# Altium PCB Water Intrusion.PcbDoc
Units mil, origin at the board's own origin, x right, y up, seen from the top; angles counter-clockwise.
Board outline 1000 x 1000 mil, 2 copper layers (Top Layer, Bottom Layer); 11 components, 6 nets, 35 pads, 13 vias.
Unrouted connection lines stored in the file: 1.
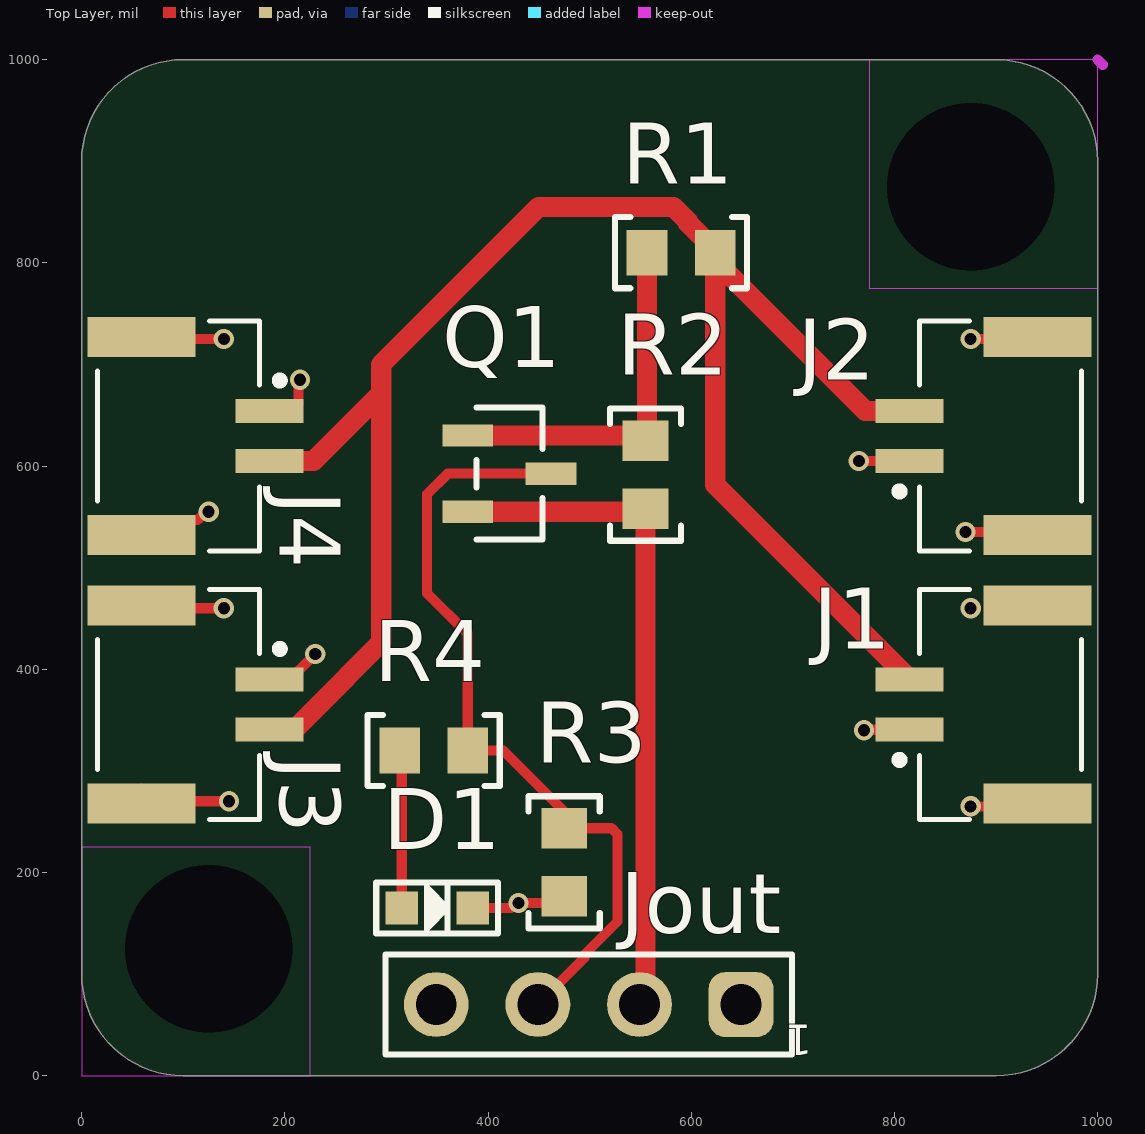
[diagram p0: Top Layer view]
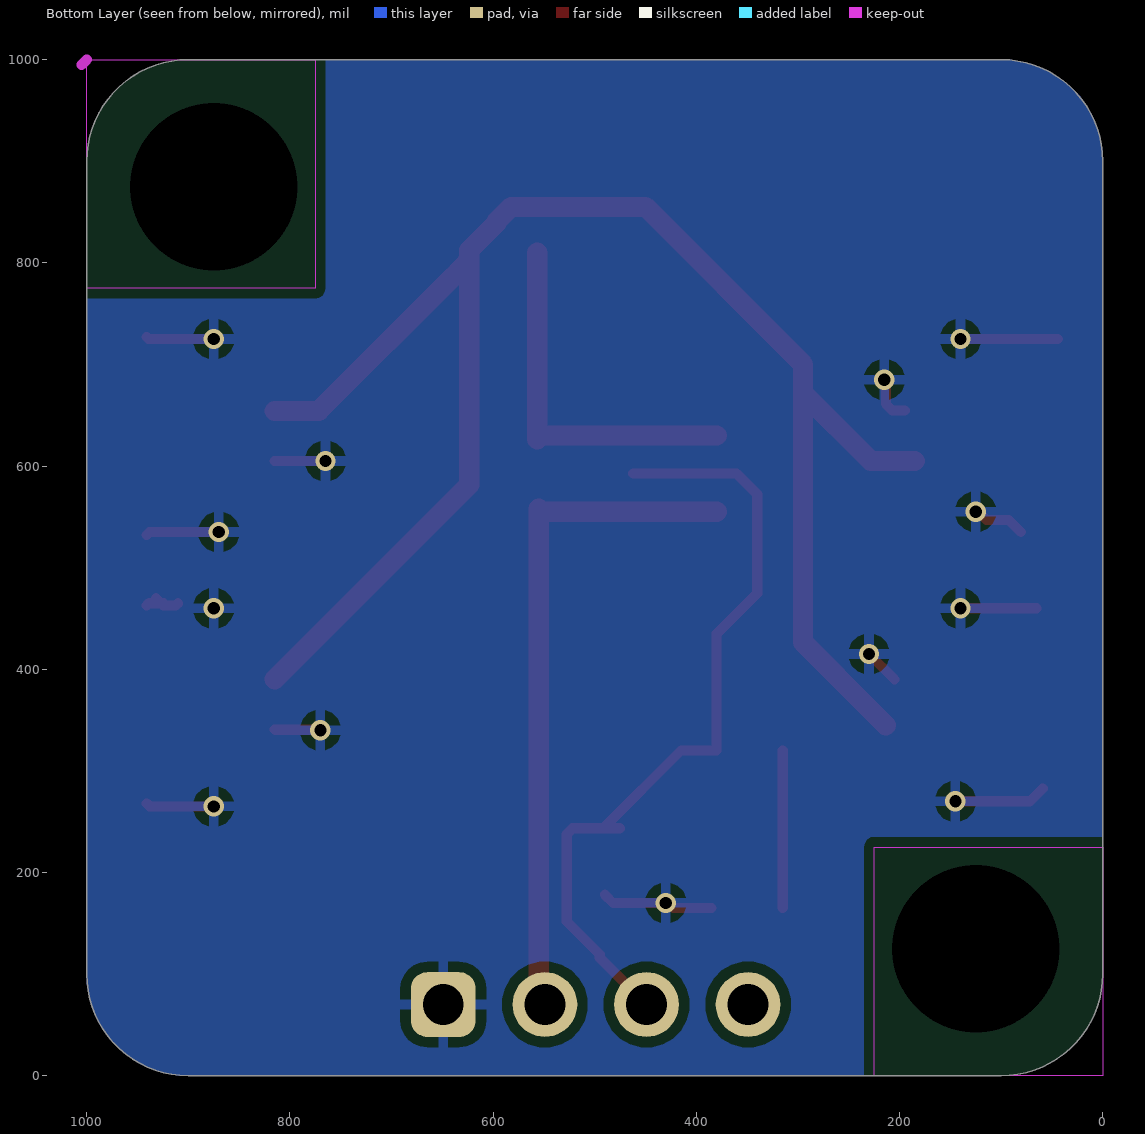
[diagram p1: Bottom Layer view, seen from below]
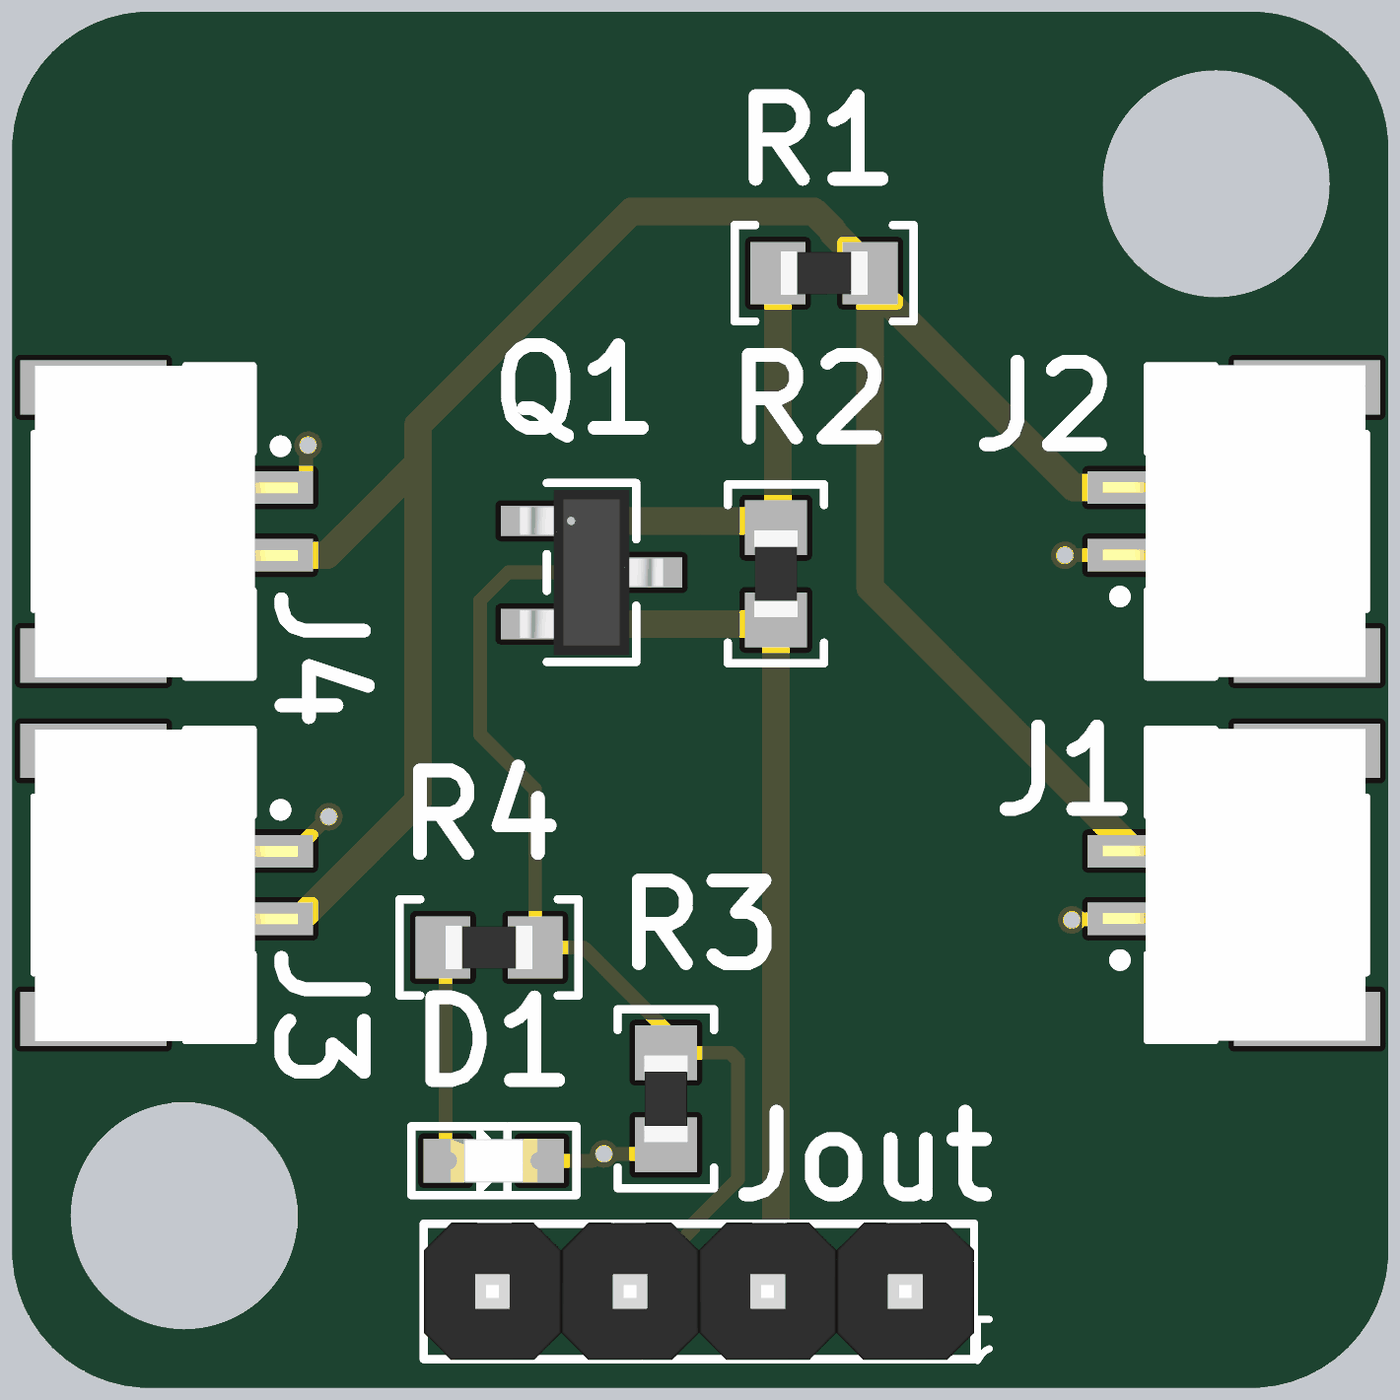
[diagram p2: 3D render of the assembled board from above, using the file's embedded part models]

## Layer stack, top to bottom
Top Solder: solder mask 0.4, Solder Resist, Dk 3.5
Top Layer: signal copper 1.4
Dielectric 1: dielectric 12.6, FR-4, Dk 4.8
Bottom Layer: signal copper 1.4
Bottom Solder: solder mask 0.4, Solder Resist, Dk 3.5

## Board outline
100,0 cw(c100,100) 0,100 0,900 cw(c100,900) 100,1000 900,1000 cw(c900,900) 1000,900 1000,100 cw(c900,100) 900,0

## Design rules (kind name [scope] priority, off if disabled: settings)
Clearance [All] p1: gap=10 ignorepadtopadclearanceinfootprint=FALSE except(0: Arc-Hole Track-Hole SMDPad-Hole THPad-Hole Via-Hole Fill-Hole Poly-Hole Region-Hole Text-Hole)
PolygonConnect [All] p1: connectstyle=Relief reliefconductorwidth=10 reliefentries=4 polygonreliefangle="90 Angle" airgapwidth=10
RoomDefinition "Water Intrustion" [InComponentClass('Water Intrustion')] p1: confinementstyle=ConfineIn formatcopy=TRUE lockcomponents=FALSE outline 1180,60 1510,60 1510,530 1180,530
RoutingVias [All] p1: holewidth=28 width=50 viastyle="Through Hole" minholewidth=28 minwidth=50 maxholewidth=28 maxwidth=50
SolderMaskExpansion [All] p1: expansion=4 istentingtop=FALSE
Width [All] p1: maxlimit=10 minlimit=10 preferedwidth=10
30 further rules are at their usual default settings.

## Components (designator, comment, footprint, x,y, rotation, side; value= is the part's Value field where it differs from the comment)
D1 "IN-S63AT5G" LED_0603 350,165 r0 top
J1 "JST GH VERT" CONN_JST_SM02B-GHS-TB(LF)(SN) 815,340.79 r90 top
J2 "JST GH VERT" CONN_JST_SM02B-GHS-TB(LF)(SN) 815,605 r90 top
J3 "JST GH VERT" CONN_JST_SM02B-GHS-TB(LF)(SN) 185,390 r270 top
J4 "JST GH VERT" CONN_JST_SM02B-GHS-TB(LF)(SN) 185,654.21 r270 top
Jout "HEADER VERT 2.54MM" HEADER_4PIN_2.54MM 649.05,70 r180 top
Q1 "PNP 60V 600mA SOT23" SOT-23-3 421,592.5 r270 top
R1 "1k Ohm 5% 1/8W" RESISTOR_0603 590,810 r0 top
R2 "27k Ohm 5% 1/8W" RESISTOR_0603 555,591.5 r90 top
R3 "1k Ohm 5% 1/8W" RESISTOR_0603 475,210 r270 top
R4 "RES SMD 240 OHM 5% 1/10W 0603" RESISTOR_0603 346.5,320 r180 top

## Footprints (in the part's own frame and the unit in brackets; to place one, negate y for a bottom-side part, rotate by r counter-clockwise, add the part's x,y. Pads: shape width x height; smd on the part's side, far side on the other; paste and mask are expansions set on the pad)
CONN_JST_SM02B-GHS-TB(LF)(SN) [mm] "JST GH Pitch 2 Pos R/A"
  rect 0.6x1.7 smd: 1(0,0) 2(1.25,0)
  rect 1x2.7 smd: S1(-1.85,-3.2) S2(3.1,-3.2)
  silkscreen extent -2.25,-4.3 3.5,0.35, body extent -2.25,-4.28 3.5,0.58, height 4.26
HEADER_4PIN_2.54MM [mm]
  rrect50% 1.62x1.62 hole 1.02: 1(0,0)
  round 1.62 hole 1.02: 2(2.54,0) 3(5.08,0) 4(7.62,0)
  silkscreen extent -1.27,-1.25 8.89,1.25, body extent -1.27,-1.27 8.89,1.27, height 10.48
LED_0603 [mil] "LED 0603"
  rect 32x32 smd: 1(-35,0) 2(35,0)
  silkscreen extent -60,-25 60,25, body extent -31,-16 32,16, height 28
RESISTOR_0603 [mil] "Resistor 0603"
  rect 40x45 smd: 1(-33.5,0) 2(33.5,0)
  silkscreen extent -65,-35 65,35, body extent -31,-16 32,16, height 16
SOT-23-3 [mil]
  rect 22x50 smd paste+0 mask+4: 1(-37.5,-41) 2(37.5,-41) 3(0,41)
  silkscreen extent -65,-33 65,33, body extent -60,-52 60,52, height 44

## Part data
D1: library part LED_Green_0603_3V, "LED Green Vf= 3V If = 0.005A / IN-S63AT5G", Color=Green, Forward Current=5mA, Forward Voltage=3V, Package=0603, Supplier Part Number 1=1830-1062-1-ND, ComponentLink1Description=Datasheet, ComponentLink1URL=https://www.we-online.de/katalog/datasheet/150060GS75000.pdf, Made By="Robert Pafford", Supplier 1=Digi-Key
J1 J2 J3 J4: library part CONN_JST_GH_2POS_VERT, "JST GH Pitch 2 Pos Vertical", Color=Natural, Current Per Pin=1A, Manufacturer=JST, Supplier Part Number 1=455-1564-1-ND, Configuration=Vertical, Created By="Robert P", Number of Positions=4, Pitch=1.25mm, Series=GH, Supplier 1=Digi-Key
Jout: library part HEADER_4PIN_2.54MM, "CONN HEADER VERT 4POS 2.54MM", Supplier Part Number 1=S1012E-04-ND, Made By="Robert Pafford", Supplier 1=Digi-Key
Q1: library part MMBT2907A-7-F, "PNP 60 V 600mA Surface Mount SOT-23", Amp Rating=600mA, Package="TO-236-3, SC-59, SOT-23-3", Power Dissipation="1.56W (Tc)", Supplier Part Number 1=MMBT2907A-FDICT-ND, BJT Type=PNP, ComponentLink1Description=Datasheet, ComponentLink1URL=https://media.digikey.com/pdf/Data%20Sheets/Diodes%20PDFs/MMBT2907A_Rev2016.pdf, Created By="Robert Pafford", Manufacturer_Part_Number=MMBT2907A-7-F, Rds (on)="50mOhm @ 3A, 4.5V", Supplier 1=Digi-Key, Vdss="20 V", Vendor=Digikey, Vgs (Max)=±10V, Vgs (th)="800mV @ 250µA"
R1 R3: library part RESISTOR_1K_0603, "RES 1k OHM 5% 1/8W 0603", Digikey Part Numer=CR0603-JW-104ELFTR-ND, Supplier Part Number 1=2019-RK73B1JTTD102JCT-ND, Tolerance="+/- 5%", Value  (Ohms)=1K, ComponentLink1Description=Datasheet, ComponentLink1URL=https://www.bourns.com/docs/product-datasheets/CRxxxxx.pdf, Made By="Robert Pafford", Supplier=Digikey, Supplier 1=Digi-Key, Wattage=1/8W
R2: library part RESISTOR_27K_0603_1, "RES SMD 27K OHM 5% 1/10W 0603", Digikey Part Numer=ERJ-3GEYJ273V, Supplier Part Number 1=P27KGCT-ND, Tolerance="+/- 5%", Value  (Ohms)=27K, ComponentLink1Description=Datasheet, ComponentLink1URL=https://www.bourns.com/docs/product-datasheets/CRxxxxx.pdf, Made By="John Ulm", Supplier=Digikey, Supplier 1=Digikey, Wattage=1/10W
R4: library part RESISTOR_240_0603, Digikey Part Numer=ERJ-3GEYJ241V, Supplier Part Number 1=P240GCT-ND, Tolerance="+/- 5%", Value  (Ohms)=240, ComponentLink1Description=Datasheet, ComponentLink1URL=https://www.bourns.com/docs/product-datasheets/CRxxxxx.pdf, Made By="John Ulm", Supplier=Digikey, Supplier 1=Digikey, Wattage=1/10W

## Free pads (board coordinates)
  round 0 hole 165 unplated: 1(125,125) 1(875,875)

## Via types
v1: diameter 20, hole 12, Top Layer to Bottom Layer, tented top, 13 vias

## Nets (pads, with @x,y where several pads share a name; then routed paths per layer and width w, separated by ;. In a path a pad name is that pad's centre, name@x,y a point inside that pad or via, vN(x,y) a via of type N, cw(c..) or ccw(c..) an arc to the next point about the centre after c; other vN are vias at no path point)
GND: D1.2 J1.1 J1.S1 J1.S2 J2.1 J2.S1 J2.S2 J3.1 J3.S1 J3.S2 J4.1 J4.S1 J4.S2 Jout.1 R3.2 | length 851.2
  Top Layer w10: J4.S1@44.02,725 v1(140,725) ; J3.S2@59.02,282.64 71.65,270 v1(145,270) ; J3.S1@65.09,460 v1(140,460) ; J4.S2@80.52,535 92.37,546.85 114.14,546.85 122.29,555 v1(125,555) ; J4.1@194.64,654.64 207.08,654.64 213.46,661.02 213.46,683.46 v1(215,685) ; J3.1@205,390 v1(230,415) ; D1.2 422.29,165 427.29,170 v1(430,170) 482,170 R3.2@490,178 ; v1(765,605) J2.1 ; v1(770,340) 770.39,340.39 814.61,340.39 J1.1 ; v1(870,535) 938.15,535 J2.S1 ; v1(875,265) 938.03,265 J1.S1 ; v1(875,725) 938.94,725 J2.S2 ; J1.S2@910,465 912.17,462.83 924.69,462.83 J1.S2@926.85,465 ; J1.S2@924.69,465 J1.S2@926.85,465 ; J1.S2@931.89,470.04 J1.S2@926.85,465 ; J1.S2 938.82,465 J1.S2@926.85,465
  other v1: 875,460
NetD1_1: D1.1 R4.2 | length 155
  Top Layer w10: D1.1 R4.2@315,320
NetQ1_1: Q1.1 R1.1 R2.2 | length 362.7
  Top Layer w10: R2.2@550,630 R2.2 R2.2@556.5,626.5
  Top Layer w20: Q1.1 R2.2@550,630 ; R2.2@556.5,626.5 R1.1
Probe: J1.2 J2.2 J3.2 J4.2 R1.2 | length 1699.8
  Top Layer w10: R1.2@623.5,812.5 R1.2 638.5,795 638.5,787.14
  Top Layer w20: J4.2 228.42,605 295,671.58 ; J3.2@213.56,345 226.75,358.19 295,426.44 295,671.58 ; R1.2 623.5,581.5 J1.2 ; R1.2@623.5,812.5 596.5,839.5 596.5,840.78 582.28,855 450,855 295,700 295,671.58 ; 638.5,787.14 771.42,654.21 J2.2
Signal: Jout.3 Q1.3 R3.1 R4.1 | length 795.3
  Top Layer w10: Jout.3 495,115.95 495,119.29 527.5,151.79 527.5,237.64 521.64,243.5 R3.1 ; Q1.3 360.29,592.5 340,572.21 340,474.86 380,434.86 R4.1 415,320 R3.1@490,245
VCC: Jout.2 Q1.2 R2.1 | length 666.7
  Top Layer w10: Jout.2 Jout.2@555,75.95 ; R2.1@552,555 R2.1
  Top Layer w20: Q1.2 R2.1@552,555 ; Jout.2@555,75.95 R2.1
pads on no net: Jout.4

## Polygon pours and split planes (outlines as drawn)
GND on Bottom Layer "GND_L02_P000" (solid, remove dead copper, pour order 0): 0,900 cw(c100,900) 100,1000 775,1000 775,775 1000,775 1000,100 cw(c900,100) 900,0 225,0 225,225 0,225

## Keep-outs
Keep-Out Layer:
  rectangle: 775,775 1000,1000
  rectangle: 0,0 225,225
  lines w10: 1000,1000 1005,995

## Text inside footprints (layer, text, board x,y; h text height)
Jout: Top Overlay "1" at 719.05,50 h30 r180